# EAGLE board dl-02 (EAGLE 7.5.0)
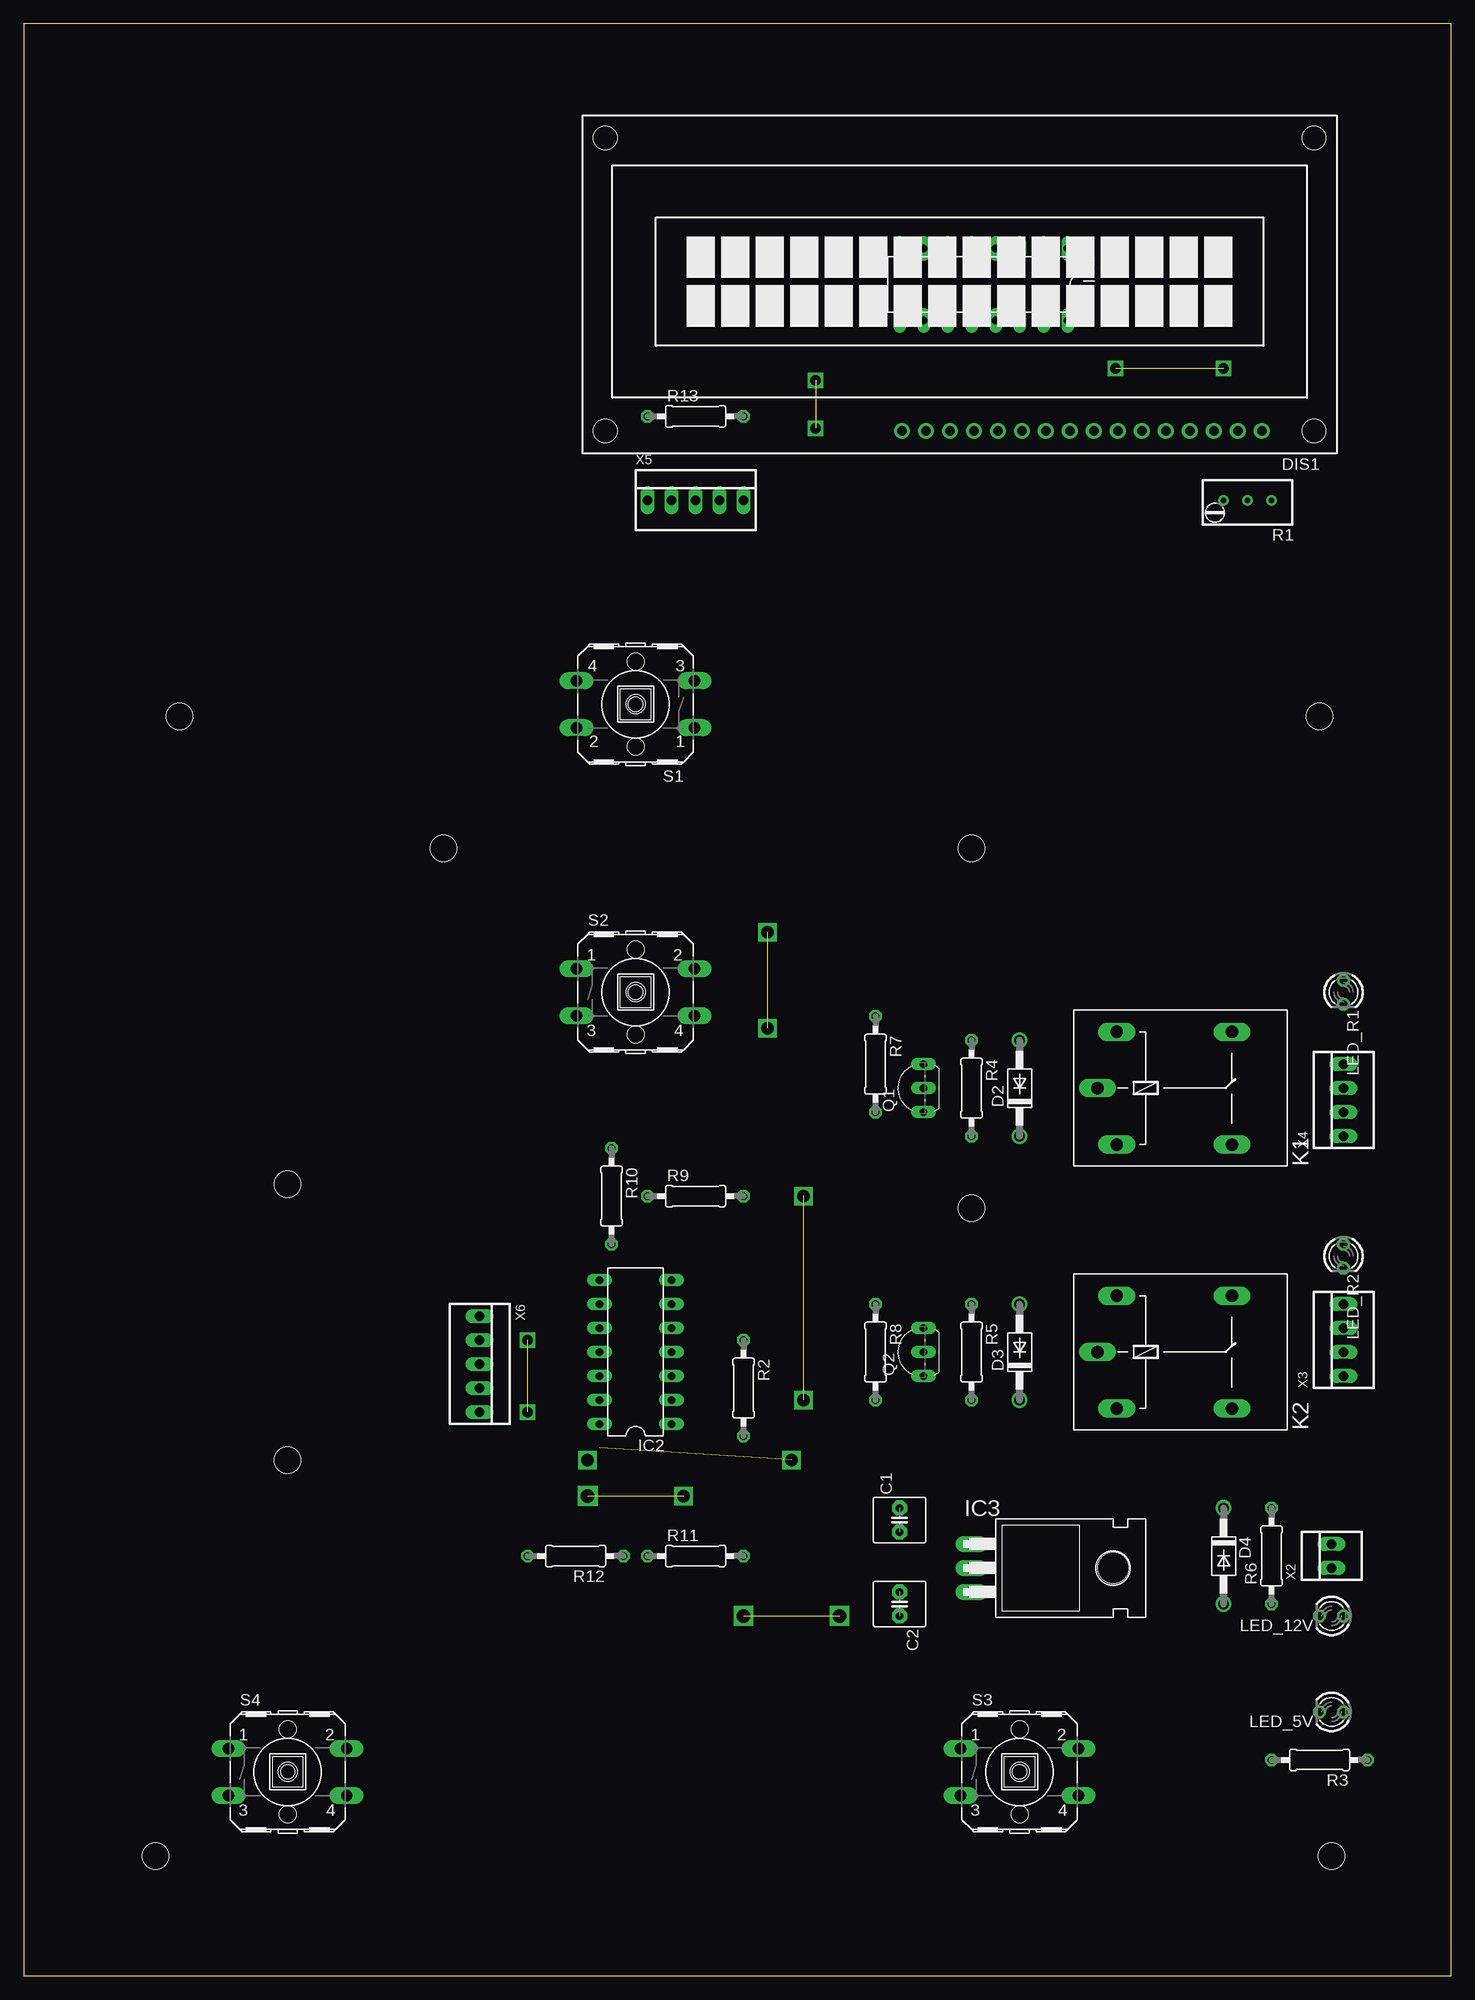
[diagram p0: board, top side]
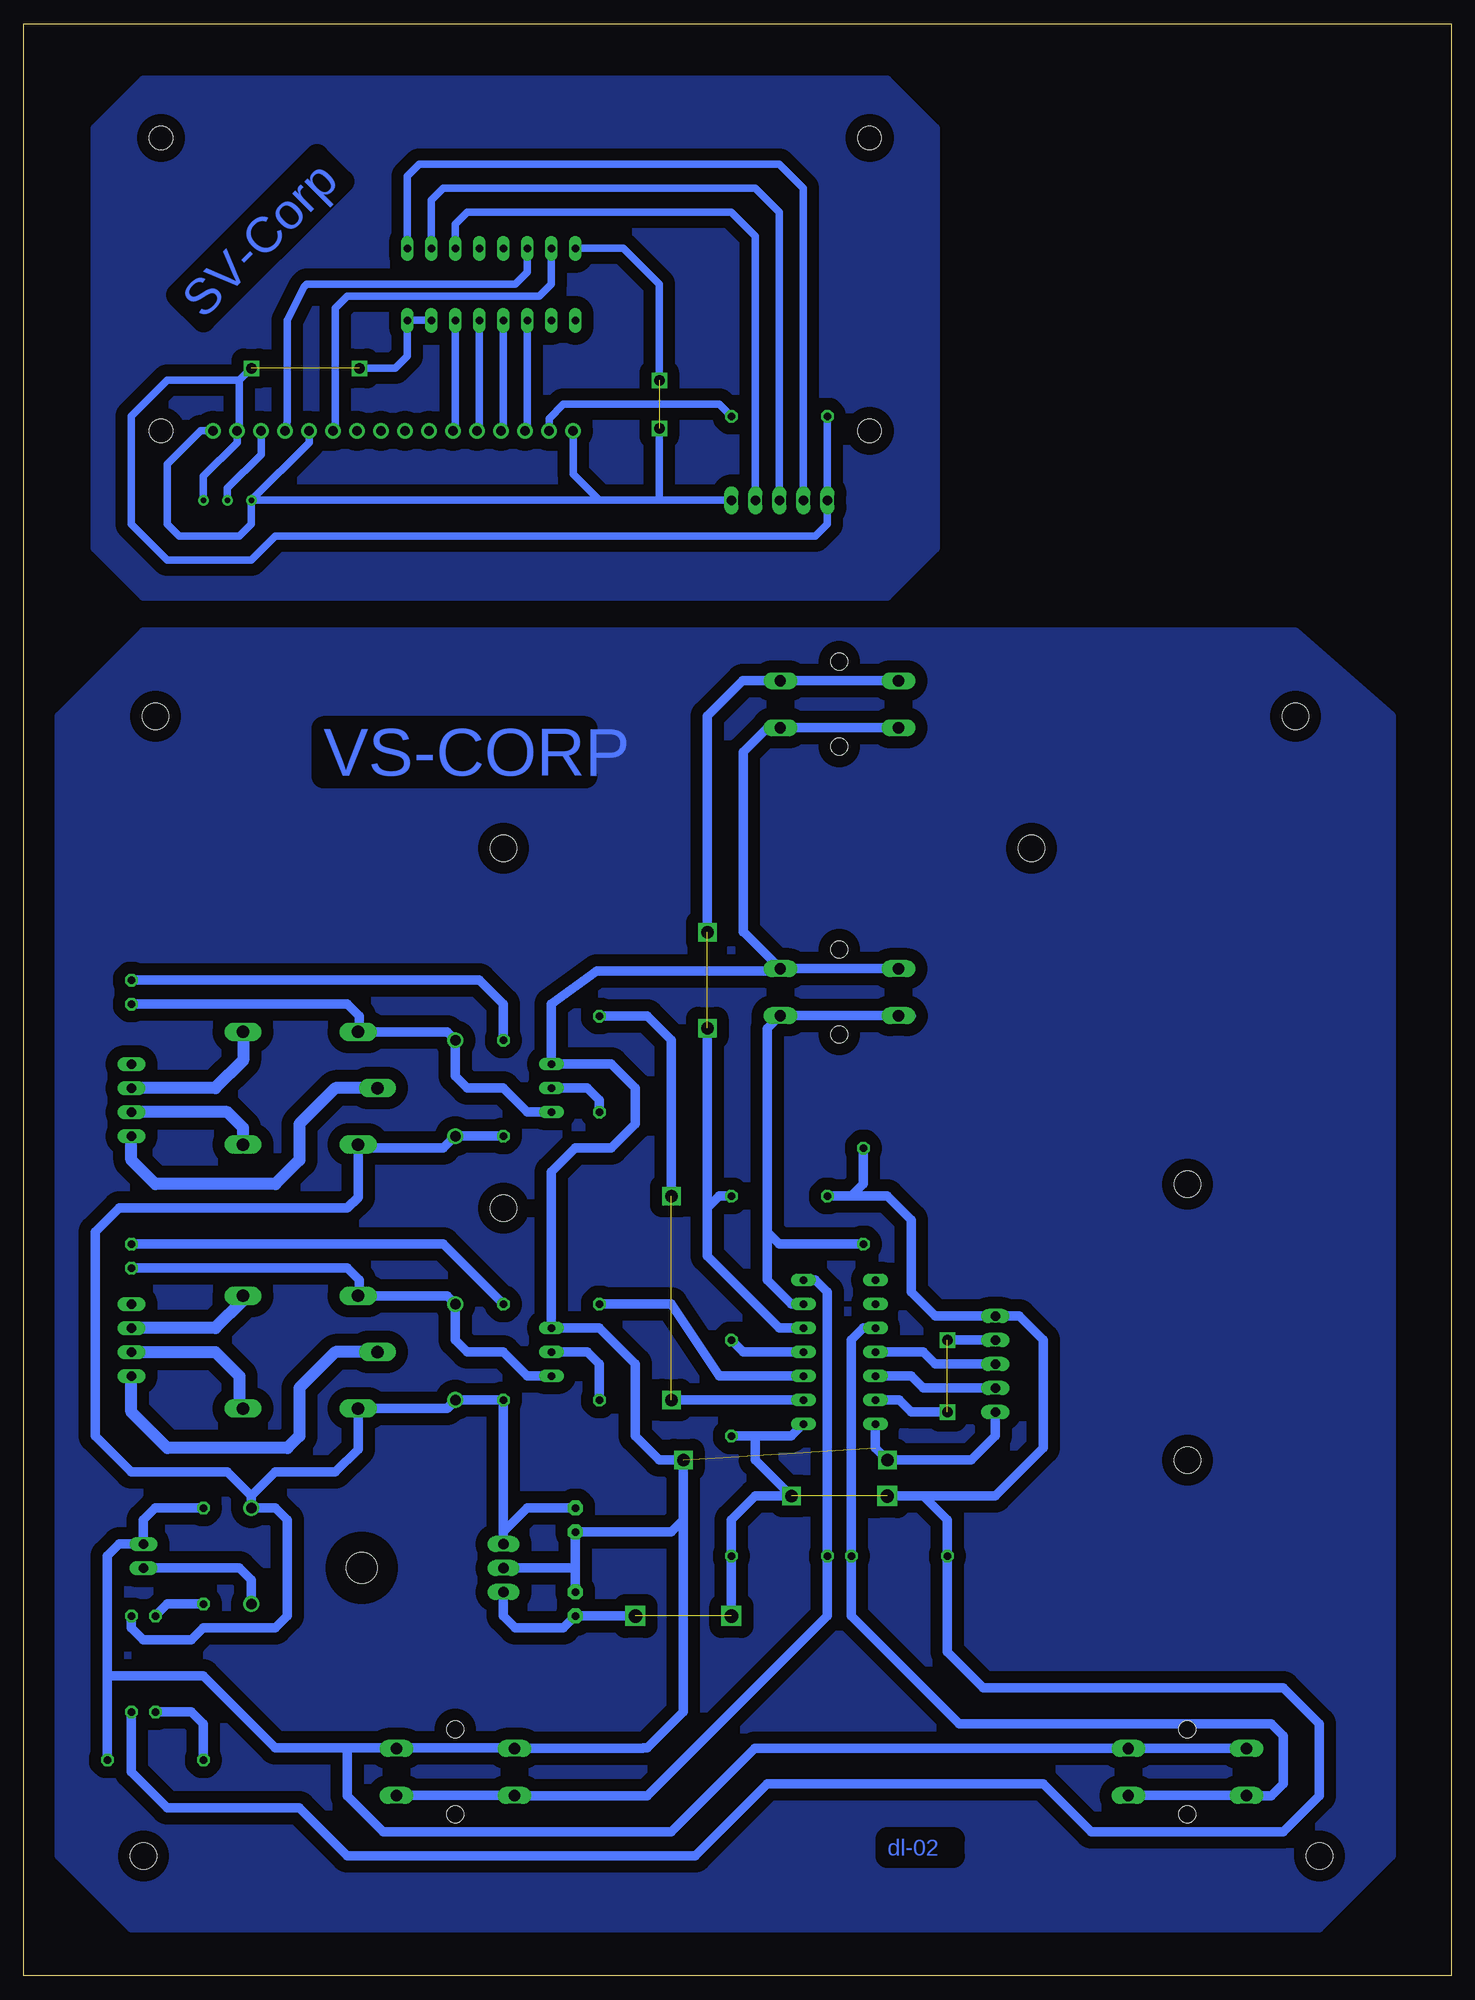
[diagram p1: board, bottom side, seen from below]

Size 151.11 x 206.68 mm. Coordinates in mm from the lower left corner, seen from the top.
Outline: 0,0 151.11,0 151.11,206.68 0,206.68 0,0
Copper layers (1*16): Top 0.035mm / dielectric 1.5mm / Bottom 0.035mm
Design rules "default": minimum track width 10mil, minimum drill 24mil, track to track 8mil, track to pad 8mil, pad to pad 8mil, via to via 8mil, smd to smd 8mil, copper to edge 40mil, drill to drill 8mil, minimum pad ring 10mil, minimum via ring 8mil, stop-mask expansion 4mil, vias tented up to drill 0mil, thermal gap 10mil
Holes 2.8 mm at 13.97,12.7 138.43,12.7 16.51,133.35 137.16,133.35 100.33,119.38 44.45,119.38 27.94,83.82 100.33,81.28 27.94,54.61

## Footprints (pad centres in the part's own frame; a part is rotated, then mirrored left to right if it is on the bottom)
C2.5-6 = drill 0.813 pad 1.6 octagon: 1 -1.27,0; 2 1.27,0
DO41-10 = drill 1.118: A 5.08,0; C -5.08,0
TUXGR_16X2_R2 = drill 1 pad 1.676: 1 -32,15.5; 2 -29.46,15.5; 3 -26.92,15.5; 4 -24.38,15.5; 5 -21.84,15.5; 6 -19.3,15.5; 7 -16.76,15.5; 8 -14.22,15.5; 9 -11.68,15.5; 10 -9.14,15.5; 11 -6.6,15.5; 12 -4.06,15.5; 13 -1.52,15.5; 14 1.02,15.5; 15 3.56,15.5; 16 6.1,15.5 | hole 2.5: -37.5,-15.5; 37.5,-15.5; -37.5,15.5; 37.5,15.5
DIL16 = drill 0.813 long: 1 -8.89,-3.81; 2 -6.35,-3.81; 3 -3.81,-3.81; 4 -1.27,-3.81; 5 1.27,-3.81; 6 3.81,-3.81; 7 6.35,-3.81; 8 8.89,-3.81; 9 8.89,3.81; 10 6.35,3.81; 11 3.81,3.81; 12 1.27,3.81; 13 -1.27,3.81; 14 -3.81,3.81; 15 -6.35,3.81; 16 -8.89,3.81
DIL14 = drill 0.813 long: 1 -7.62,-3.81; 2 -5.08,-3.81; 3 -2.54,-3.81; 4 0,-3.81; 5 2.54,-3.81; 6 5.08,-3.81; 7 7.62,-3.81; 8 7.62,3.81; 9 5.08,3.81; 10 2.54,3.81; 11 0,3.81; 12 -2.54,3.81; 13 -5.08,3.81; 14 -7.62,3.81
TO220H = drill 1.118 long: 1 -2.54,-10.16; 2 0,-10.16; 3 2.54,-10.16 | hole 3.302: 0,4.826
G5LE = drill 1.321 long: 1 -7.493,-5.969; 2 -7.493,5.969; O 4.699,5.969; P -9.525,0; S 4.699,-5.969
LED3MM = drill 0.813 octagon: A -1.27,0; K 1.27,0
TO92-EBC = drill 0.813 long: B 0,-1.27; C -2.54,-1.27; E 2.54,-1.27
RTRIMT93YA = drill 0.61: 1 0,-2.54; 2 0,0; 3 0,2.54
0207/10 = drill 0.813 octagon: 1 -5.08,0; 2 5.08,0
B3F-40XX = drill 1.194 long: 1 -6.248,2.489; 2 6.248,2.489; 3 -6.248,-2.489; 4 6.248,-2.489 | hole 1.803: 0,-4.496; 0,4.496
22-23-2021 = drill 1 long: 1 -1.27,0; 2 1.27,0
22-23-2041 = drill 1 long: 1 -3.81,0; 2 -1.27,0; 3 1.27,0; 4 3.81,0
22-23-2051 = drill 1 long: 1 -5.08,0; 2 -2.54,0; 3 0,0; 4 2.54,0; 5 5.08,0

## Placement (x,y rotation side)
C1  [C2.5-6]  92.71,48.26 90 top
C2  [C2.5-6]  92.71,39.37 270 top
D2  1N4004  [DO41-10]  105.41,93.98 90 top
D3  1N4004  [DO41-10]  105.41,66.04 90 top
D4  1N4004  [DO41-10]  127,44.45 270 top
DIS1  TUXGR_16X2_R2  [TUXGR_16X2_R2]  99.06,179.07 180 top
IC1  4094N  [DIL16]  101.6,179.07 180 top
IC2  PIC16F676P  [DIL14]  64.77,66.04 90 top
IC3  7805T  [TO220H]  110.49,43.18 270 top
K1  G5L  [G5LE]  123.19,93.98 0 top
K2  G5L  [G5LE]  123.19,66.04 0 top
LED_5V  [LED3MM]  138.43,27.94 180 top
LED_12V  [LED3MM]  138.43,38.1 180 top
LED_R1  [LED3MM]  139.7,104.14 270 top
LED_R2  [LED3MM]  139.7,76.2 270 top
Q1  BC548  [TO92-EBC]  93.98,93.98 90 top
Q2  BC548  [TO92-EBC]  93.98,66.04 90 top
R1  [RTRIMT93YA]  129.54,156.21 90 top
R2  [0207/10]  76.2,62.23 270 top
R3  [0207/10]  137.16,22.86 180 top
R4  [0207/10]  100.33,93.98 270 top
R5  [0207/10]  100.33,66.04 270 top
R6  [0207/10]  132.08,44.45 90 top
R7  [0207/10]  90.17,96.52 270 top
R8  [0207/10]  90.17,66.04 270 top
R9  [0207/10]  71.12,82.55 0 top
R10  [0207/10]  62.23,82.55 270 top
R11  [0207/10]  71.12,44.45 0 top
R12  [0207/10]  58.42,44.45 180 top
R13  [0207/10]  71.12,165.1 0 top
S1  [B3F-40XX]  64.77,134.62 180 top
S2  [B3F-40XX]  64.77,104.14 0 top
S3  [B3F-40XX]  105.41,21.59 0 top
S4  [B3F-40XX]  27.94,21.59 0 top
X2  22-23-2021  [22-23-2021]  138.43,44.45 90 top
X3  22-23-2041  [22-23-2041]  139.7,67.31 90 top
X4  22-23-2041  [22-23-2041]  139.7,92.71 90 top
X5  22-23-2051  [22-23-2051]  71.12,156.21 0 top
X6  22-23-2051  [22-23-2051]  48.26,64.77 270 top

## Library data of the parts
C1 C2 = capacitor-wima
D2-D4 = diode
DIS1 = display-lcd; OC_FARNELL: unknown; OC_NEWARK: unknown
IC1 = 40xx
IC2 = microchip; MF: MICROCHIP; MPN: PIC16F676-I/P; OC_FARNELL: 9760512; OC_NEWARK: 54K2829
IC3 = linear
K1 K2 = relay; OC_FARNELL: unknown; OC_NEWARK: unknown
LED_5V LED_12V LED_R1 LED_R2 = led
Q1 Q2 = transistor-npn
R1 = rcl
R2-R13 = resistor
S1-S4 = switch-omron; MF: OMRON COMPONENTS USA; MPN: B3F-4000; OC_FARNELL: 176434; OC_NEWARK: 36K3105
X2 = con-molex; MF: MOLEX; MPN: 22-23-2021; OC_FARNELL: 1462926; OC_NEWARK: 25C3832
X3 X4 = con-molex; MF: MOLEX; MPN: 22-23-2041; OC_FARNELL: 1462920; OC_NEWARK: 38C0355
X5 X6 = con-molex; MF: MOLEX; MPN: 22-23-2051; OC_FARNELL: 1462952; OC_NEWARK: 38C9178

## Nets
E: DIS1.6 IC1.7
GND: C1.1 C2.1 IC2.14 IC3.2 Q1.E Q2.E R3.1 R6.2 S1.1 S1.2 S2.1 S2.2 S3.1 S3.2 S4.1 S4.2 X2.2 X6.5
N$1: DIS1.3 R1.2
N$2: DIS1.11 IC1.14
N$3: DIS1.12 IC1.13
N$4: DIS1.13 IC1.12
N$5: DIS1.14 IC1.11
N$6: IC2.11 X6.3
N$7: IC2.13 X6.2
N$8: IC2.12 X6.4
N$9: IC2.4 R2.1
N$10: Q1.B R7.2
N$11: D2.A K1.2 LED_R1.K Q1.C
N$12: D3.A K2.2 LED_R2.K Q2.C
N$13: Q2.B R8.2
N$15: K2.P X3.1
N$16: K2.S X3.2
N$17: K2.O X3.3
N$18: K1.S X4.2
N$19: K1.P X4.1
N$20: K1.O X4.3
N$21: D4.A X2.1
N$22: LED_5V.K R3.2
N$23: LED_R2.A R5.1
N$25: IC2.6 R10.2 S2.3 S2.4
N$26: LED_R1.A R4.1
N$27: IC2.7 R11.1 S3.3 S3.4
N$28: IC2.10 R12.1 S4.3 S4.4
N$30: LED_12V.K R6.1
N$31: IC1.3 X5.4
N$32: IC1.2 X5.3
N$33: IC1.1 X5.2
N$34: IC2.5 R9.2 S1.3 S1.4
N$35: DIS1.15 R13.2
N$37: C1.2 D2.C D3.C D4.C IC3.1 K1.1 K2.1 LED_12V.A R4.2 R5.2
RELAY1: IC2.2 R7.1
RELAY2: IC2.3 R8.1
RS: DIS1.4 IC1.6
VCC: C2.2 IC2.1 IC3.3 LED_5V.A R2.2 R9.1 R10.1 R11.2 R12.2 X6.1
VDD: DIS1.2 IC1.15 IC1.16 R1.1 R13.1 X5.1
VSS: DIS1.1 DIS1.5 DIS1.16 IC1.8 R1.3 X5.5

## Tracks (layer width: path | path; a pad name or v marks a point on that pad's centre or on a via)
E
  Bottom 0.813: IC1.7 95.25,179.07 96.52,177.8 116.84,177.8 118.11,176.53 118.11,163.82 DIS1.6
GND  (via drill 1.3)  (1 unrouted)
  Bottom 1.016: X6.5 48.26,57.15 50.8,54.61 v59.69,54.61 60.96,55.88 IC2.14 | R3.1 142.24,31.75 | 142.24,31.75 142.24,44.45 140.97,45.72 X2.2 138.43,48.26 137.16,49.53 R6.2 | 81.28,48.26 81.28,27.94 85.09,24.13 85.55,24.13 85.6,24.08 S3.1 99.21,24.13 111.71,24.13 | 81.28,48.26 v81.28,54.61 83.82,54.61 86.36,57.15 86.36,64.77 90.17,68.58 Q2.E 95.25,85.09 92.71,87.63 88.9,87.63 86.36,90.17 86.36,93.98 88.9,96.52 Q1.E 95.25,102.87 90.45,106.4 71.25,106.4 S2.2 | S1.2 S1.1 72.34,132.13 74.93,129.54 74.93,110.49 74.88,110.49 S2.2 | S2.2 S2.1 | 111.71,24.13 S3.2 | 116.84,24.13 116.84,19.05 113.03,15.24 82.55,15.24 73.71,24.08 S4.2 S4.1 | 111.71,24.13 116.84,24.13 | 92.71,43.18 C1.1 82.55,46.99 81.28,48.26 | 92.71,43.18 C2.1 | IC3.2 92.71,43.18 | 116.84,24.13 124.46,24.13 132.08,31.75 142.24,31.75
N$1
  Bottom 0.813: DIS1.3 125.98,161.04 129.54,157.48 R1.2
N$2
  Bottom 0.813: IC1.14 105.41,163.82 DIS1.11
N$3
  Bottom 0.813: IC1.13 102.87,163.82 DIS1.12
N$4
  Bottom 0.813: IC1.12 100.33,163.82 DIS1.13
N$5
  Bottom 0.813: IC1.11 97.79,163.82 DIS1.14
N$6
  Bottom 1.016: X6.3 54.61,64.77 55.88,66.04 IC2.11
N$7  (via drill 1.1)  (1 unrouted)
  Bottom 1.016: X6.2 v53.34,67.31 | IC2.13 58.42,60.96 57.15,59.69 v53.34,59.69
N$8
  Bottom 1.016: X6.4 55.88,62.23 57.15,63.5 IC2.12
N$9
  Bottom 1.016: IC2.4 74.93,66.04 R2.1
N$10
  Bottom 1.016: Q1.B 91.44,93.98 90.17,92.71 R7.2
N$11
  Bottom 1.016: Q1.C 97.79,91.44 100.33,93.98 104.14,93.98 105.41,95.25 D2.A 106.3,99.95 K1.2 115.57,100.08 115.57,101.6 116.84,102.87 LED_R1.K
N$12
  Bottom 1.016: Q2.C 97.79,63.5 100.33,66.04 104.14,66.04 105.41,67.31 D3.A 106.3,72.01 K2.2 115.57,72.14 115.57,73.66 116.84,74.93 LED_R2.K
N$13
  Bottom 1.016: Q2.B 91.44,66.04 90.17,64.77 R8.2
N$14
  pour Bottom (isolate 1.27): 59.69,200.66 138.43,200.66 143.51,195.58 143.51,151.13 138.43,146.05 59.69,146.05 54.61,151.13 54.61,195.58
N$15
  Bottom 1.27: K2.P 118.11,66.04 121.92,62.23 121.92,57.15 123.19,55.88 135.89,55.88 139.7,59.69 X3.1
N$16
  Bottom 1.27: X3.2 130.81,66.04 128.27,63.5 128.27,60.45 K2.S
N$17
  Bottom 1.27: K2.O 127.89,71.5 130.81,68.58 X3.3
N$18
  Bottom 1.27: K1.S 127.89,89.79 129.54,91.44 X4.2
N$19
  Bottom 1.27: K1.P 118.11,93.98 121.92,90.17 121.92,86.36 124.46,83.82 137.16,83.82 139.7,86.36 X4.1
N$20
  Bottom 1.27: X4.3 130.81,93.98 127.89,96.9 K1.O
N$21
  Bottom 1.016: X2.1 128.27,43.18 127,41.91 D4.A
N$22
  Bottom 1.016: LED_5V.K 133.35,27.94 132.08,26.67 R3.2
N$23
  Bottom 1.016: R5.1 106.68,77.47 LED_R2.A
N$24
  pour Bottom (isolate 1.27): 16.51,142.24 138.43,142.24 147.32,133.35 147.32,12.7 139.7,5.08 13.97,5.08 6.35,12.7 6.35,133.35
N$25
  Bottom 1.016: IC2.6 69.85,71.12 72.39,73.66 72.39,78.74 | 72.39,78.74 72.39,100.28 S2.4 S2.3 58.47,101.6 57.15,101.6 | R10.2 71.12,77.47 72.39,78.74
N$26
  Bottom 1.016: R4.1 100.33,102.87 102.87,105.41 LED_R1.A
N$27
  Bottom 1.016: IC2.7 67.31,73.66 66.04,72.39 R11.1 66.04,38.1 85.09,19.05 99.11,19.05 S3.3 S3.4
N$28
  Bottom 1.016: IC2.10 62.23,68.58 63.5,67.31 R12.1 63.5,38.1 52.07,26.67 19.05,26.67 17.78,25.4 17.78,20.32 19.05,19.05 21.64,19.05 S4.3 | S4.3 21.64,19.1 | S4.3 S4.4
N$30
  Bottom 1.016: LED_12V.K 135.89,39.37 R6.1
N$31
  Bottom 0.813: IC1.3 105.41,185.42 104.14,186.69 76.2,186.69 73.66,184.15 X5.4
N$32
  Bottom 0.813: IC1.2 107.95,187.96 106.68,189.23 73.66,189.23 71.12,186.69 X5.3
N$33
  Bottom 0.813: IC1.1 110.49,190.5 109.22,191.77 71.12,191.77 68.58,189.23 X5.2
N$34  (via drill 1.1, 1.3)  (1 unrouted)
  Bottom 0.813: 58.47,137.16 S1.4
  Bottom 1.016: IC2.5 71.12,68.58 78.74,76.2 78.74,81.28 | 78.74,81.28 v78.74,100.33 | v78.74,110.49 78.74,133.35 74.98,137.11 S1.3 S1.4 | R9.2 77.47,82.55 78.74,81.28
N$35
  Bottom 0.813: DIS1.15 95.5,164.85 93.98,166.37 77.47,166.37 R13.2
N$37
  Bottom 1.016: R4.2 D2.C 106.68,87.63 115.32,87.63 K1.1 115.7,82.42 116.84,81.28 140.97,81.28 143.51,78.74 143.51,57.15 139.7,53.34 129.54,53.34 127,50.8 | 127,50.8 D4.C 124.46,49.53 123.19,48.26 123.19,38.1 124.46,36.83 132.08,36.83 133.35,35.56 138.43,35.56 139.7,36.83 LED_12V.A | 127,50.8 124.46,53.34 118.11,53.34 115.7,55.75 K2.1 106.3,60.07 D3.C R5.2 100.33,46.99 | 100.33,46.99 IC3.1 | C1.2 97.79,49.53 100.33,46.99
RELAY1  (via drill 1.3)  (1 unrouted)
  Bottom 1.016: R7.1 85.09,101.6 82.55,99.06 v82.55,82.55 | IC2.2 v82.55,60.96
RELAY2
  Bottom 1.016: R8.1 82.55,71.12 77.47,63.5 IC2.3
RS
  Bottom 0.813: IC1.6 97.79,180.34 99.06,179.07 121.16,179.07 121.41,178.82 123.19,175.26 123.19,164.59 DIS1.4
VCC  (via drill 1.3, 1.4, 1.4 pad 1.27)  (2 unrouted)
  Bottom 1.016: 55.88,50.8 48.26,50.8 43.18,55.88 43.18,67.31 45.72,69.85 X6.1 54.61,69.85 57.15,72.39 57.15,80.01 59.69,82.55 63.5,82.55 | 55.88,50.8 v59.69,50.8 | IC2.1 69.85,57.15 73.66,57.15 | 73.66,57.15 R2.2 | 73.66,57.15 73.66,54.61 v69.85,50.8 73.66,50.8 76.2,48.26 R11.2 v76.2,38.1 | 55.88,50.8 53.34,48.26 R12.2 53.34,34.29 49.53,30.48 17.78,30.48 13.97,26.67 13.97,19.05 17.78,15.24 38.1,15.24 43.18,20.32 72.39,20.32 80.01,12.7 116.84,12.7 121.92,17.78 135.89,17.78 139.7,21.59 LED_5V.A | R9.1 63.5,82.55 | 63.5,82.55 62.23,83.82 R10.1 | IC3.3 100.33,38.1 99.06,36.83 93.98,36.83 C2.2 v86.36,38.1
VDD  (via drill 1.1)  (1 unrouted)
  Bottom 0.813: IC1.15 IC1.16 110.49,171.45 111.76,170.18 v115.57,170.18 | R1.1 132.08,158.75 128.52,162.31 DIS1.2 128.27,163.82 128.27,168.91 | 128.27,168.91 v127,170.18 | 128.27,168.91 135.89,168.91 139.7,165.1 139.7,153.67 135.89,149.86 127,149.86 124.46,152.4 67.31,152.4 66.04,153.67 X5.1 R13.1
VSS  (via drill 1.1)  (1 unrouted)
  Bottom 0.813: IC1.8 87.63,182.88 83.82,179.07 v83.82,168.91 | DIS1.1 132.34,163.57 135.89,160.02 135.89,153.67 134.62,152.4 128.27,152.4 127,153.67 R1.3 | DIS1.5 120.9,162.31 R1.3 | X5.5 83.82,156.21 | 83.82,156.21 90.17,156.21 | 90.17,156.21 R1.3 | DIS1.16 92.96,159 90.17,156.21 | 83.82,156.21 v83.82,163.83

## Text on the board
Bottom: SV-Corp | VS-CORP | dl-02